# Altium PCB E-39 IPS.PcbDoc
Units mil, origin at the board's own origin, x right, y up, seen from the top; angles counter-clockwise.
Board outline 1428.58 x 2023.08 mil, 2 copper layers (Top Layer, Bottom Layer); 36 components, 68 nets, 305 pads, 129 vias.
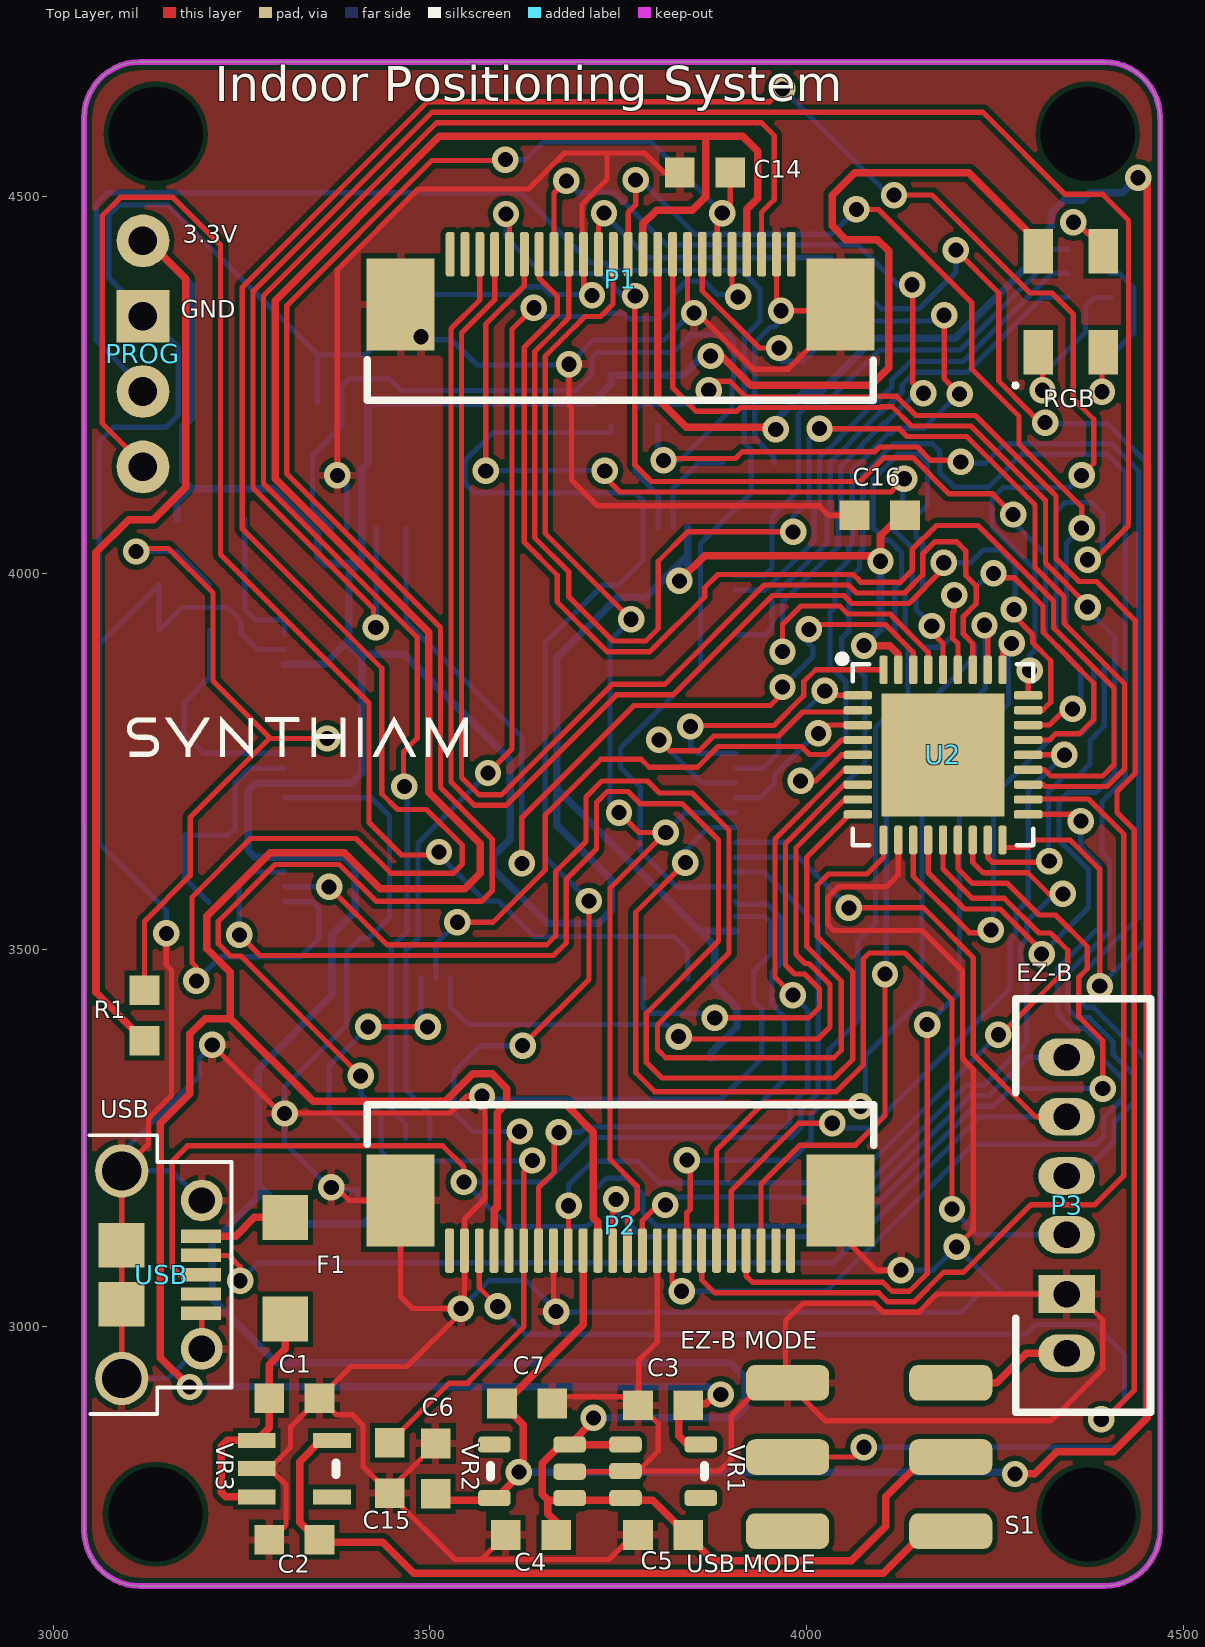
[diagram p0: Top Layer view]
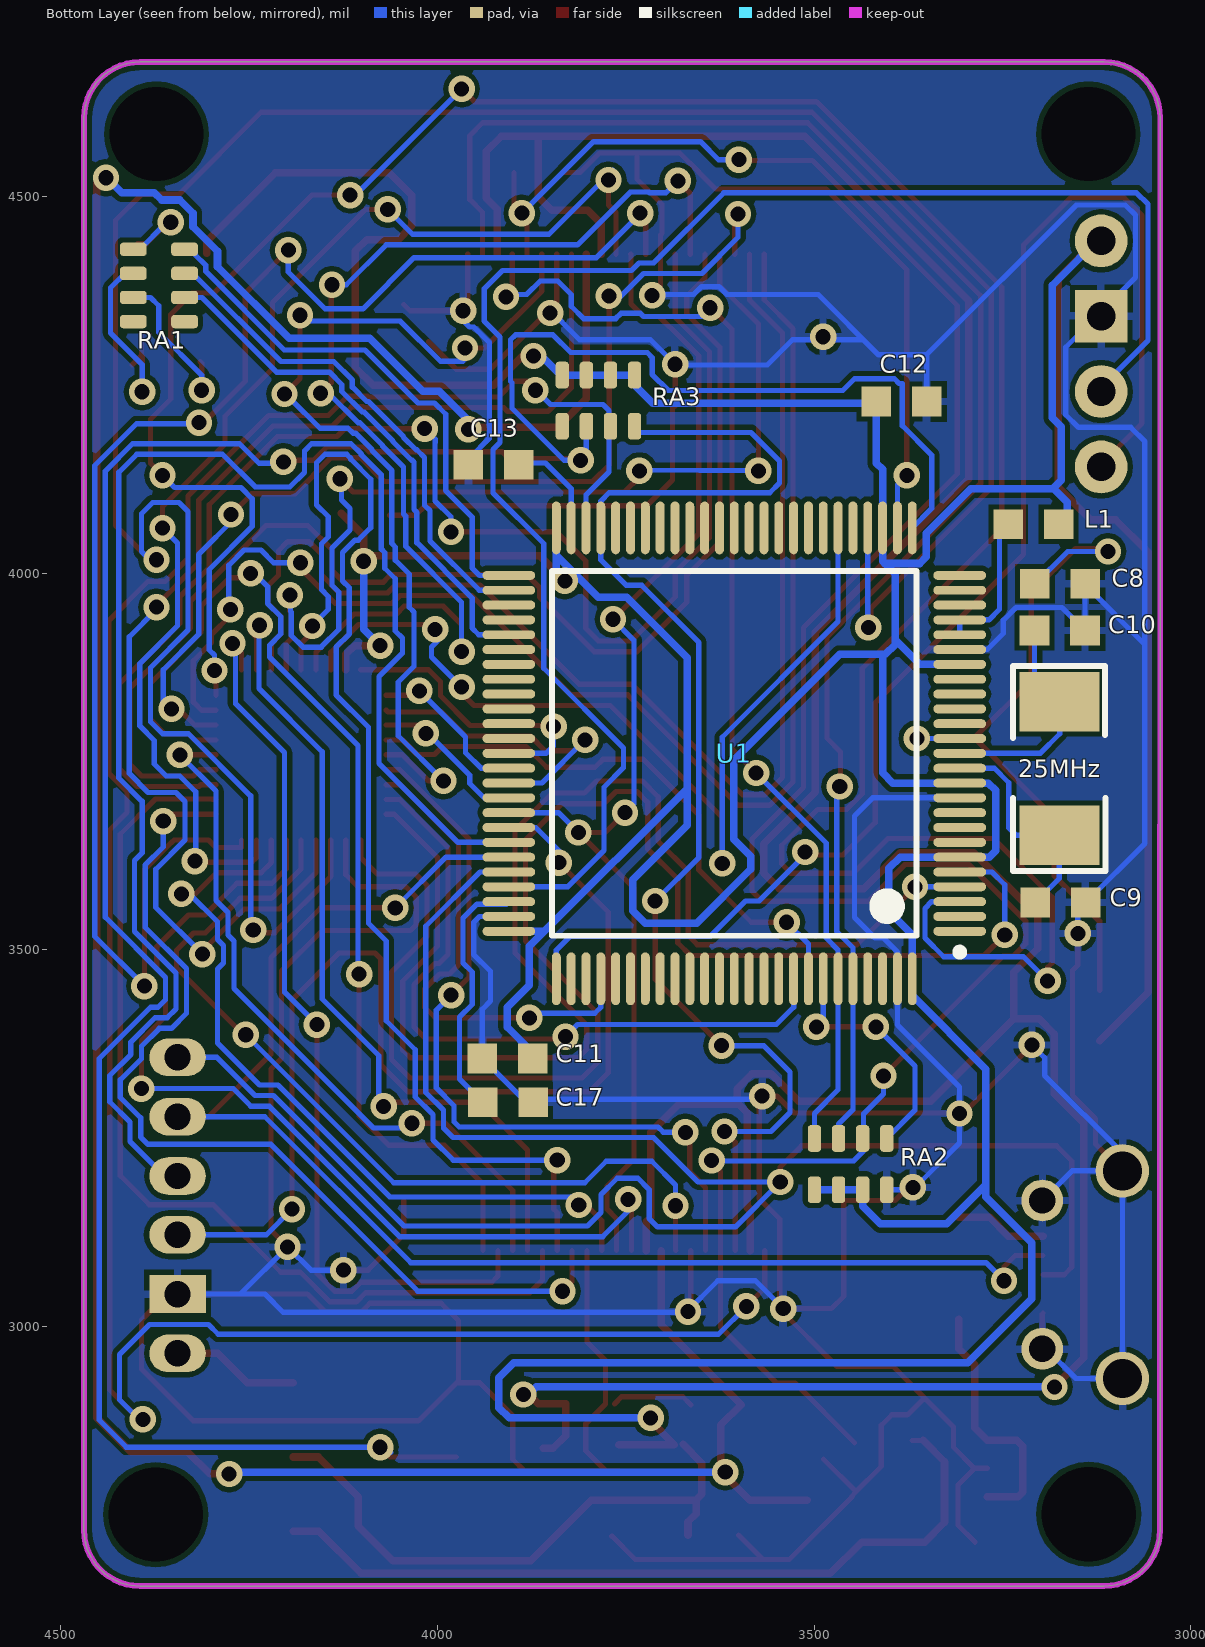
[diagram p1: Bottom Layer view, seen from below]

## Layer stack, top to bottom
Top Layer: signal copper 1.4
Dielectric: dielectric 12.6, FR-4, Dk 4.8
Bottom Layer: signal copper 1.4

## Board outline
3040.8,2730.03 3040.68,4604.46 3040.69,4604.46 cw(c3115,4604.46) 3115,4678.77 3115,4678.71 4394.88,4678.7 cw(c4394.88,4604.38) 4469.19,4604.38 4469.27,4604.38 4469.27,2730.01 cw(c4394.95,2730.01) 4394.95,2655.69 4394.95,2655.7 3115.18,2655.71 3115.18,2655.72 cw(c3115.18,2730.03)

## Design rules (kind name [scope] priority, off if disabled: settings)
Clearance [All] p1: gap=7
PolygonConnect [All] p1: connectstyle=Relief reliefconductorwidth=10 reliefentries=4 polygonreliefangle="90 Angle"
RoutingVias [All] p1: holewidth=20 width=35 viastyle="Through Hole" minholewidth=20 minwidth=35 maxholewidth=28 maxwidth=50
SMDNeckDown [All] p1: percent=93.000
SilkscreenOverComponentPads [All] p1: minsilkscreentomaskgap=10
SolderMaskExpansion [All] p1: expansion=4
Width Width_2 [InNet('VIN')] p1: maxlimit=50 minlimit=7 preferedwidth=50 minimp=50.000000 maximp=50.000000 favimp=50.000000
Width Width_1 [InNet('1.5V') OR  InNet('VCC') OR InNet('2.8V') OR InNet('3.3V') OR InNet('VDD')] p2: maxlimit=10 minlimit=7 preferedwidth=10 minimp=50.000000 maximp=50.000000 favimp=50.000000
Width [All] p3: maxlimit=15 minlimit=7 preferedwidth=7 minimp=50.000000 maximp=50.000000 favimp=50.000000
27 further rules are at their usual default settings.

## Components (designator, comment, footprint, x,y, rotation, side; value= is the part's Value field where it differs from the comment)
25MHz "XTAL 8MHz" Crystal 3175,3742 r90 bottom
C1 "Cap" "0603 TIGHT" 3320,2905 r0 top
C2 "Cap" "0603 TIGHT" 3320,2717 r180 top
C3 "2.2uF" "0603 TIGHT" 3809.5,2895.5 r180 top
C4 "2.2uF" "0603 TIGHT" 3634,2723.5 r180 top
C5 "2.2uF" "0603 TIGHT" 3809.5,2723.5 r180 top
C6 "2.2uF" "0603 TIGHT" 3507.5,2811.5 r90 top
C7 "100nF" "0603 TIGHT" 3629,2898 r0 top
C8 "100nF" "0603 TIGHT" 3173.5,3986 r180 bottom
C9 "18pF" "0603 TIGHT" 3173,3563 r180 bottom
C10 "18pF" "0603 TIGHT" 3174,3924 r180 bottom
C11 "100nF" "0603 TIGHT" 3907,3356 r0 bottom
C12 "100nF" "0603 TIGHT" 3384,4228 r0 bottom
C13 "2.2uF" "0603 TIGHT" 3925.5,4144 r0 bottom
C14 "18pF" "0603 TIGHT" 3865,4532 r0 top
C15 "18pF" "0603 TIGHT" 3446.5,2812.5 r90 top
C16 "18pF" "0603 TIGHT" 4097,4077 r0 top
C17 "2.2uF" "0603 TIGHT" 3906.5,3298 r180 bottom
F1 "PolyFuse - 500mA" 1206 3308,3010 r90 top
L1 "Ferrite" "0603 tight" 3209,4065.25 r180 bottom
P1 "FPC 24pin Header" "FPC Connector 24pin" 4078,4382.5 r180 top (schematic designator P2)
P2 "FPC 24pin Header" "FPC Connector 24pin" 3427.61,3142 r0 top
P3 "6-pin JST" "JST-PH 6pin" 4345,3161 r90 top
PROG "Not populated" HDR1X4 3119,4441.25 r270 top
R1 "Res1" "0603 TIGHT" 3121,3413 r270 top
RA1 "680 ohm" "Resistor Array 4" 4368.5,4381.5 r270 bottom
RA2 "4.7kohm" "Resistor Array 4" 3451,3217 r180 bottom
RA3 "4.7kohm" "Resistor Array 4" 3787,4228 r0 bottom
RGB "RGBLED-CA" RGBLED-CA 4350.5,4360.5 r270 top (schematic designator "RGB LED")
S1 "DPDT" "SWITCH DPDT SMD" 4083,2827 r0 top
U1 "STM32F407VET6" LQFP100_M 3606,3761 r0 bottom
U2 "TS3DV20812" QFN-36 4181,3759 r0 top
USB "USB Connector" "MICRO USB" 3144,3069 r270 top
VR1 "2.8VREG" "SOT-25 New" 3816.5,2808.5 r90 top
VR2 "1.5VREG" "SOT-25 New" 3628.5,2807.5 r270 top
VR3 "SPX3819M5-L-3-3/TR" SOT-25 3370,2774 r90 top

## Footprints (in the part's own frame and the unit in brackets; to place one, negate y for a bottom-side part, rotate by r counter-clockwise, add the part's x,y. Pads: shape width x height; smd on the part's side, far side on the other; paste and mask are expansions set on the pad)
"0603 TIGHT" [mm]
  rect 1x1 smd: 1(-0.85,0) 2(0.85,0)
"0603 tight" [mm]
  rect 1x1 smd: 1(-0.85,0) 2(0.85,0)
1206 [mil]
  rect 60x60 smd: 1(0,0) 2(135,0)
Crystal [mm] "16Mhz Crystal"
  rect 2x2.7 smd: 1(-2.276,-0.01) 2(2.22,-0.01)
  silkscreen extent -3.48,-1.57 3.43,1.54
"FPC Connector 24pin" [mm]
  rect 2.3x3.1 smd: 0(0.843,0.65) 0(15.677,0.65)
  rrect50% 0.3x1.5 smd: 1(2.5,-1.041) 2(3,-1.041) 3(3.5,-1.041) 4(4,-1.041) 5(4.5,-1.041) 6(5,-1.041) 7(5.5,-1.041) 8(6,-1.041) 9(6.5,-1.041) 10(7,-1.041) 11(7.5,-1.041) 12(8,-1.041) 13(8.5,-1.041) 14(9,-1.041) 15(9.5,-1.041) 16(10,-1.041) 17(10.5,-1.041) 18(11,-1.041) 19(11.5,-1.041) 20(12,-1.041) 21(12.5,-1.041) 22(13,-1.041) 23(13.5,-1.041) 24(14,-1.041)
  silkscreen extent -0.27,2.51 16.8,3.88
HDR1X4 [mil] "Connector; Header; 4 Position"
  round 70 hole 38: 1(0,0) 3(200,0) 4(300,0)
  rect 70x70 hole 38: 2(100,0)
"JST-PH 6pin" [mil]
  oval 50x75 hole 35: 1(-196.46,0) 3(-38.98,0) 4(38.98,0) 5(117.72,0) 6(196.46,0)
  rect 50x75 hole 35: 2(-117.72,0)
  silkscreen extent -274,-111 274,68
LQFP100_M [mm] "Thin QFP, 100-Leads, Body 14x14mm, Pitch 0.5mm, IPC Low Density"
  oval 1.778x0.3 smd: 1(-7.6,6) 2(-7.6,5.5) 3(-7.6,5) 4(-7.6,4.5) 5(-7.6,4) 6(-7.6,3.5) 7(-7.6,3) 8(-7.6,2.5) 9(-7.6,2) 10(-7.6,1.5) 11(-7.6,1) 12(-7.6,0.5) 13(-7.6,0) 14(-7.6,-0.5) 15(-7.6,-1) 16(-7.6,-1.5) 17(-7.6,-2) 18(-7.6,-2.5) 19(-7.6,-3) 20(-7.6,-3.5) 21(-7.6,-4) 22(-7.6,-4.5) 23(-7.6,-5) 24(-7.6,-5.5) 25(-7.6,-6) 51(7.6,-6) 52(7.6,-5.5) 53(7.6,-5) 54(7.6,-4.5) 55(7.6,-4) 56(7.6,-3.5) 57(7.6,-3) 58(7.6,-2.5) 59(7.6,-2) 60(7.6,-1.5) 61(7.6,-1) 62(7.6,-0.5) 63(7.6,0) 64(7.6,0.5) 65(7.6,1) 66(7.6,1.5) 67(7.6,2) 68(7.6,2.5) 69(7.6,3) 70(7.6,3.5) 71(7.6,4) 72(7.6,4.5) 73(7.6,5) 74(7.6,5.5) 75(7.6,6)
  oval 0.3x1.778 smd: 26(-6,-7.6) 27(-5.5,-7.6) 28(-5,-7.6) 29(-4.5,-7.6) 30(-4,-7.6) 31(-3.5,-7.6) 32(-3,-7.6) 33(-2.5,-7.6) 34(-2,-7.6) 35(-1.5,-7.6) 36(-1,-7.6) 37(-0.5,-7.6) 38(0,-7.6) 39(0.5,-7.6) 40(1,-7.6) 41(1.5,-7.6) 42(2,-7.6) 43(2.5,-7.6) 44(3,-7.6) 45(3.5,-7.6) 46(4,-7.6) 47(4.5,-7.6) 48(5,-7.6) 49(5.5,-7.6) 50(6,-7.6) 76(6,7.6) 77(5.5,7.6) 78(5,7.6) 79(4.5,7.6) 80(4,7.6) 81(3.5,7.6) 82(3,7.6) 83(2.5,7.6) 84(2,7.6) 85(1.5,7.6) 86(1,7.6) 87(0.5,7.6) 88(0,7.6) 89(-0.5,7.6) 90(-1,7.6) 91(-1.5,7.6) 92(-2,7.6) 93(-2.5,7.6) 94(-3,7.6) 95(-3.5,7.6) 96(-4,7.6) 97(-4.5,7.6) 98(-5,7.6) 99(-5.5,7.6) 100(-6,7.6)
  silkscreen extent -7.72,-6.15 6.15,6.82, body extent -7,-7 7,7, height 1.6
"MICRO USB" [mm]
  round 1.8 hole 1.321: 0(-3.5,-1.35) 0(3.5,-1.35)
  round 1.408 hole 0.889: 0(-2.5,1.35) 0(2.5,1.35)
  rect 1.5x1.55 smd: 0(-1,-1.35) 0(1,-1.35)
  rect 0.45x1.35 smd: 1(-1.3,1.325) 2(-0.65,1.325) 3(0,1.325) 4(0.65,1.325) 5(1.3,1.325)
  silkscreen extent -4.7,-2.44 4.7,2.35
QFN-36 [mil]
  rect 163.39x163.39 smd: 0(0,0)
  rrect50% 38x11.02 smd: 1(-113,79) 2(-113,59.25) 3(-113,39.5) 4(-113,19.75) 5(-113,0) 6(-113,-19.75) 7(-113,-39.5) 8(-113,-59.25) 9(-113,-79) 19(113,-79) 20(113,-59.25) 21(113,-39.5) 22(113,-19.75) 23(113,0) 24(113,19.75) 25(113,39.5) 26(113,59.25) 27(113,79)
  rrect50% 11.02x38 smd: 10(-79,-113) 11(-59.25,-113) 12(-39.5,-113) 13(-19.75,-113) 14(0,-113) 15(19.75,-113) 16(39.5,-113) 17(59.25,-113) 18(79,-113) 28(79,113) 29(59.25,113) 30(39.5,113) 31(19.75,113) 32(0,113) 33(-19.75,113) 34(-39.5,113) 35(-59.25,113) 36(-79,113)
  silkscreen extent -139,-120 120,132
"Resistor Array 4" [mm]
  rrect50% 0.45x0.9 smd: 1(-1.235,0.834) 2(-1.235,-0.894) 3(-0.422,0.834) 4(-0.422,-0.894) 5(0.391,0.834) 6(0.391,-0.894) 7(1.204,0.834) 8(1.204,-0.894)
RGBLED-CA [mm]
  rect 1.5x1 smd: 1(1.7,-1.1) 2(-1.7,-1.1) 3(-1.7,1.1) 4(1.7,1.1)
  silkscreen extent 2.81,-1.88 2.83,-1.85
SOT-25 [mil]
  rect 20x50 smd: 1(0,0) 2(75,0) 3(38,100) 4(0,100) 5(75,100)
  silkscreen extent 30,-5 45,-5
"SOT-25 New" [mm]
  rrect50% 0.55x1.1 smd: 1(-0.914,-1.092) 2(0.889,-1.092) 3(0,1.448) 4(-0.914,1.448) 5(0.889,1.448)
  silkscreen extent -0.2,-1.22 0.18,-1.22
"SWITCH DPDT SMD" [mm]
  rrect50% 2.8x1.2 smd: 1(2.75,-2.5) 2(2.75,0) 3(2.75,2.5) 4(-2.75,-2.5) 5(-2.75,0) 6(-2.75,2.5)

## Part data
25MHz: library part XTAL, "Crystal Oscillator"
C1 C2: "Capacitor"
C3 C4 C5 C6 C7 C8 C9 C10 C11 C12 C13 C14 C15 C16 C17: library part Cap, "Capacitor"
F1: library part PolyFuse, "PTC .50A 15VDC RESETTABLE 1812L"
L1: library part Inductor, "Inductor"
P1 P2: library part "Header 24", "Header, 24-Pin"
P3: library part "Header 6", "Header, 6-Pin"
PROG: library part "Header 4"
R1: "Resistor"
RA1 RA2 RA3: library part "Resistor Array 4"
S1: library part "SWITCH DPDT"
U1: library part STM32F2
VR1 VR2 VR3: library part "Vreg SOT25"

## Free pads (board coordinates)
  round 0 hole 125 unplated: 1(3135.55,2751.05) 1(3136,4583) 1(4373,4583) 1(4374,2750.5)

## Via types
v1: diameter 35, hole 20, Top Layer to Bottom Layer, tented both sides, 129 vias

## Nets (pads, with @x,y where several pads share a name; then routed paths per layer and width w, separated by ;. In a path a pad name is that pad's centre, name@x,y a point inside that pad or via, vN(x,y) a via of type N, cw(c..) or ccw(c..) an arc to the next point about the centre after c; other vN are vias at no path point)
1.5V: C6.1 C7.1 P1.10 P2.10 VR2.2 | length 4012.7
  Top Layer w10: C6.1@3509.5,2769.5 3585.5,2769.5 3624,2808 3624,2869.54 3597.04,2896.5 3703.2,3002.66 P2.10 ; P1.10 3802.41,4231.59 3840,4194 v1@3959,4194 ; v1(4276.5,2804.5) 4302.5,2804.5 4332,2834 4407,2834 4452,2879 4452,4518 v1@4440,4530
  Bottom Layer w10: v1(3618,2807) 4275.5,2807 v1@4276.5,2808 ; v1(3959,4191) 3959,4203 3997.5,4241.5 4019.5,4241.5 4090,4312 4197,4312 4291.97,4406.97 4291.97,4427.35 4324.5,4459.88 4324.5,4478.22 4341.78,4495.5 4366.22,4495.5 4375.72,4505 4419,4505 v1@4439.5,4525.5
  other v1: 4440,4525
2.8V: C3.1 P1.4 P1.11 P2.4 P2.11 VR1.2 | length 4903.3
  Top Layer w10: v1(3181,2920) 3142,2959 3142,3270 3181,3309 3181,3388.5 3201.5,3409 3235,3409 ; P2.4 3585.09,3154.09 ; 3602,3295 3602,3316 3582.5,3335.5 3556.78,3335.5 3520.28,3299 3345,3299 3235,3409 ; P2.11 3722.88,3139 3717,3144.88 3717,3258 3680,3295 3600,3295 3589,3284 3589,3159.91 ; P1.11 3782.72,4464 3800.74,4482.01 3848.01,4482.01 3866,4500 3866,4580 ; VR1.2@3859.5,2838.5 3846.65,2838.5 3830,2855.15 3830,2897.5 3866.5,2897.5 v1@3879,2910 ; P1.4 3920.52,4483.52 3935,4498 3935,4560 3915,4580 3866,4580 ; 3235,3409 3235,3470.48 3203.5,3501.98 3203.5,3544.5 3288,3629 3386,3629 3434,3581 3546,3581 3567,3602 3567,3641 3498.5,3709.5 3498.5,3921.58 3294.5,4125.58 3294.5,4361.98 3512.52,4580 3866,4580 ; 3585.09,3154.09 3585.09,3156 3589,3159.91 ; 3585.09,3154.09 3589,3158 3589,3159.91
  Bottom Layer w10: v1(3181,2920) 3869,2920 v1@3879,2910
  other v1: 3886,2910
3.3V: P3.1 S1.3 | length 169.9
  Top Layer w10: S1.3 4252.43,2925.43 4291.54,2964.54 P3.1
5V: C1.1 F1.1 VR3.4 VR3.5 | length 337.5
  Top Layer w10: VR3.4 3229,2774 3223,2780 3223,2841 3231,2849 VR3.5 3286.54,2865.54 3286.54,2905.5 3286.54,2949.54 3308,2971 F1.1
BLUE: RA1.1 U1.51 | length 727.4
  Bottom Layer w7: U1.51 3944,3997.22 3954,4007.22 3954,4074.72 3989.15,4109.87 3989.15,4168.03 3989,4168.18 3989,4211.08 4003.92,4226 4025.92,4226 4096.42,4296.5 4203.42,4296.5 4307.47,4400.55 4307.47,4408.73 4321.47,4422.73 4321.47,4427.55 4324.03,4430.11 RA1.1@4346.68,4430.11
BOOT0: RA2.7 U1.94 | length 331.9
  Top Layer w7: v1(3418,3398) v1(3497,3398)
  Bottom Layer w7: RA2.7 3366,3287.43 3366,3346 v1(3418,3398) ; U1.94 3487.89,3407.11 v1(3497,3398)
D0: U1.63 U2.36 | length 399.5
  Top Layer w7: v1(3845.71,3796.63) 3845.71,3788.29 3846,3788 3856,3798 3956.6,3798 3996,3837.4 3996,3856 4012,3872 U2.36
  Bottom Layer w7: v1(3845.71,3796.63) 3846,3796.34 3846,3771 3856,3761 U1.63
D0_A: P1.19 U2.31 | length 1334
  Top Layer w7: v1(3574,4136) 3574,4331 3625.24,4382.24 P1.19 ; v1@3732,4137 3732,4128 3752,4108 4112,4108 v1@4120.25,4116.25 ; v1@4127.5,4123.5 v1(4129.5,4125.5) ; v1(4196,3971) 4196,3950.4 4194,3948.4 4194,3913.6 4200.75,3906.85 U2.31
  Bottom Layer w7: v1(3574,4136) v1@3731.99,4137 ; v1(4129.5,4125.5) 4127.5,4123.5 4127.5,4097.5 4116,4086 4116,4057.4 4140,4033.4 4140,3984.1 4131,3975.1 4131,3925.4 4154.4,3902 4178.6,3902 4194,3917.4 4194,3948.4 4195,3949.4 4195,3970 v1(4196,3971)
  other v1: 3732,4136
D0_B: P2.19 U2.29 | length 1131.5
  Top Layer w7: P2.19 3880.36,3234.36 3944,3298 4065,3298 4071,3292 v1(4071.5,3292.5) ; v1(4236,3931) 4237,3932 4247.2,3921.8 4240.25,3914.85 U2.29
  Bottom Layer w7: v1(4071.5,3292.5) 4078,3299 4078,3360 4153,3435 4153,3763 4237,3847 4237,3932 v1(4236,3931)
D1: U1.64 U2.1 | length 220.1
  Top Layer w7: v1(4024,3844) 4030,3838 U2.1
  Bottom Layer w7: U1.64 3942.32,3741.32 3962.74,3761.74 3962.74,3782.74 v1(4024,3844)
D1_A: P1.21 U2.30 | length 1736.2
  Top Layer w7: P1.21 3585.87,4363 3542,4319.13 3542,3729 3565,3706 3595,3706 3741.63,3852.63 3811.63,3852.63 3943.5,3984.5 4055.6,3984.5 4066.1,3974 4129.9,3974 4154,3998.1 4154,4025.6 4170.4,4042 4199,4042 4211,4030 4211,3997.4 4225,3983.4 4225,3959.6 4208,3942.6 4208,3919.4 4220.5,3906.9 U2.30
D1_B: P2.21 U2.28 | length 1225.6
  Top Layer w7: P2.21 3919.73,3067.27 3928,3059 4101.4,3059 4113.4,3047 4136.6,3047 4160,3070.4 v1(4160,3401) ; U2.28 4260,3895 v1(4272,3907)
  Bottom Layer w7: v1(4160,3401) 4203,3444 4203,3762 4268,3827 4268,3903 v1(4272,3907) 4272,3909 v1@4266,3915
D2: U1.65 U2.2 | length 417.4
  Top Layer w7: v1(3803.94,3779) 3818.44,3764.5 3857.2,3764.5 3876.7,3784 3962.4,3784 3994.4,3816 4065.75,3816 U2.2
  Bottom Layer w7: v1(3803.94,3779) 3861.31,3721.63 U1.65
D2_A: P1.22 U2.26 | length 1875.3
  Top Layer w7: P1.22 3566.19,4363.11 3528,4324.92 3528,3723.2 3559.2,3692 3600.8,3692 3747.43,3838.63 3822.63,3838.63 3954.5,3970.5 4049.8,3970.5 4060.3,3960 4135.7,3960 4180.5,4004.8 v1@4180.5,4013.5 ; v1(4275,3952) 4275,3943.6 4300,3918.6 4300,3908 4324,3884 4324,3829 4313.25,3818.25 U2.26
  Bottom Layer w7: v1(4182,4014) 4217.4,4014 4234.4,4031 4256.6,4031 4277,4010.6 v1@4277,3952
D2_B: P2.22 U2.24 | length 1438.8
  Top Layer w7: P2.22 3939.42,3189.42 3991,3241 4065,3241 4104,3280 v1(4104,3468) ; v1@4257.8,3997.2 4257.8,3994 4276,3994 4313.7,3956.3 4313.7,3924.7 4314,3924.4 4314,3921.8 4348,3887.8 4348,3887 4381,3854 4381,3806 4362,3787 4330.4,3787 4322.15,3778.75 U2.24
  Bottom Layer w7: v1(4104,3468) 4105.5,3469.5 4105.5,3771.5 4223,3889 4223,3904.4 4208,3919.4 4208,3942.6 4225.4,3960 4225.4,3982.4 4239,3996 v1@4249,3996 ; v1@4246,4003 v1@4248.8,4003
  other v1: 4248,4000
D3: U1.66 U2.3 | length 213.8
  Top Layer w7: v1(4015.5,3787.5) 4026.5,3798.5 U2.3
  Bottom Layer w7: U1.66 3937.82,3701.94 3957.24,3721.36 3957.24,3732.24 4004.62,3779.62 4015.5,3779.62 v1(4015.5,3787.5)
D3_A: P1.20 U2.25 | length 1453
  Top Layer w7: v1(3601,4477) 3605.56,4472.44 P1.20 ; v1@3771,4366 3772,4365 3772,4144 3794,4122 4071,4122 4102.5,4153.5 4141.1,4153.5 4189.1,4105.5 4246.5,4105.5 v1(4274,4078) ; U2.25 4322.1,3798.5 4343.6,3820 v1(4353,3820)
  Bottom Layer w7: v1(3601,4477) 3601,4446 3649,4398 3726.6,4398 3767.6,4357 3772,4357 3771,4358 v1@3771,4366 ; v1@4269,4073 4317,4025 4317,3918.8 4364,3871.8 4364,3830 v1@4349,3815
  other v1: 3772.5,4368
D3_B: P2.20 U2.23 | length 953.8
  Top Layer w7: P2.20 3900.05,3180.69 3989.36,3270 v1(4034,3270) ; U2.23 v1(4342,3759)
  Bottom Layer w7: v1(4034,3270) 4040.26,3263.74 4084.74,3263.74 4270,3449 4270,3511.9 4278,3519.9 4278,3549.8 4294,3565.8 4294,3711 v1(4342,3759)
D4: U1.79 U2.7 | length 655.5
  Top Layer w7: v1(3878,3410) 4003,3410 4017,3424 4017,3448.36 3997.36,3468 3984,3468 3972,3480 3972,3641.55 4049.95,3719.5 U2.7
  Bottom Layer w7: U1.79 3783.17,3424 3791.17,3416 3872,3416 v1(3878,3410)
D4_A: P1.18 U2.22 | length 1711.4
  Top Layer w7: P1.18 3644.93,4392.07 3669,4368 3669,4343.9 3649.6,4324.5 3625,4299.9 3625,4041.4 3669,3997.4 3669,3962 3735,3896 3792.2,3896 3864.7,3968.5 3864.7,3981 3882.2,3998.5 4061.8,3998.5 4070,3990.3 4070,3989.9 4071.9,3988 4124.1,3988 4140,4003.9 4140,4031.4 4172.1,4063.5 4227.51,4063.5 4327.7,3963.3 4327.7,3930.49 4328,3930.2 4328,3927.6 4364.01,3891.6 4408,3847.6 4408,3746 4393,3731 4324,3731 4315.75,3739.25 U2.22
D4_B: P2.18 U2.20 | length 1280.8
  Top Layer w7: P2.18 3860.68,3062 3877.68,3045 4095.6,3045 4107.6,3033 4142.4,3033 4181.68,3072.28 4208,3072.28 4297.72,3162 4382.5,3162 4421,3200.5 4421,3653.6 4374.22,3700.38 4298.31,3700.38 4298.31,3699.75 U2.20
D5: U1.92 U2.8 | length 933.5
  Top Layer w7: v1(3830,3385) 3833,3382 4015,3382 4031,3398 4031,3454.16 4003.16,3482 3998,3482 3986,3494 3986,3635.75 4050,3699.75 U2.8
  Bottom Layer w7: U1.92 3527.26,3424 3550.26,3401 3814,3401 v1(3830,3385)
D5_A: P1.16 U2.21 | length 1945
  Top Layer w7: P1.16 3684.3,4339.4 3663.6,4318.7 3639,4294.1 3639,4047.2 3684.3,4001.9 3684.3,3968.7 3743,3910 3786.4,3910 3803,3926.6 3803,4016 3842,4055 v1(3982,4055) ; v1(4017,4192) 4122.8,4192 4133.3,4181.5 4212.51,4181.5 4303,4091.01 4303,4007.8 4341.7,3969.1 4341.7,3936.29 4342,3935.99 4342,3933.4 4369.8,3905.6 4422,3853.4 4422,3740.2 4398.8,3717 4316.5,3717 4314,3719.5 U2.21
  Bottom Layer w7: v1(3982,4055) 3982,4075 4003.15,4096.15 4003.15,4173.83 4003,4173.98 4003,4178 v1(4017,4192)
D5_B: P2.16 U2.19 | length 1286.7
  Top Layer w7: P2.16 3821.31,3059.69 v1(3834,3047) ; U2.19 4355,3680 v1(4364,3671)
  Bottom Layer w7: v1(3834,3047) 4026,3047 4221,3242 4384,3242 4394,3252 4394,3277.4 4421,3304.4 4421,3327.6 4393,3355.6 4393,3372.16 4369.16,3396 4353,3396 4333,3416 4333,3475.2 4388,3530.2 4388,3612.8 4364,3636.8 v1(4364,3671)
D6: U1.4 U2.9 | length 1773.3
  Top Layer w7: v1(3366.17,3583.83) 3443,3507 3655,3507 3667,3519 3667,3604.2 3707,3644.2 3707,3703.28 3728,3724.28 3788.72,3724.28 3804.72,3708.28 3847.72,3708.28 3897,3659 3897,3495.83 3802,3400.83 3802,3368 3813,3357 4036,3357 4046,3367 4046,3458.96 4000,3504.96 4000,3623 4057,3680 U2.9
  Bottom Layer w7: U1.4 v1(3366.17,3583.83)
D6_A: P1.14 U2.18 | length 2136.4
  Top Layer w7: P1.14 3723.67,4469.67 3731,4477 v1(3731,4478) ; v1(4198,4429) 4255,4372 4255,4255.3 4296,4214.3 4296,4214 4307,4203 4316.5,4212.5 v1(4316.5,4200) ; U2.18 4260,3636 4294,3636 4304,3646 4349.4,3646 4352.4,3643 4353,3643 4389,3607 v1(4389,3452)
  Bottom Layer w7: v1(3731,4478) 3731,4477 3789,4419 4031,4419 4099,4351 4149,4351 4198,4400 v1(4198,4429) ; v1(4316.5,4200) 4316.5,4212.5 4330.5,4198.5 4399.5,4198.5 4454.87,4143.13 4454.87,3517.87 v1(4389,3452)
D6_B: P2.14 U2.16 | length 1074.7
  Top Layer w7: P2.14 3781.94,3141 3813,3172.06 3817.56,3167.5 3812.5,3162.44 v1(3812.5,3161.5) ; U2.16 4220.5,3616.01 4234.01,3602.5 4293.5,3602.5 4322,3574 4322.5,3574.5 v1(4340,3574.5)
  Bottom Layer w7: v1(3812.5,3161.5) 3812.5,3162.44 3817.56,3167.5 3813,3172.06 4063.17,3172.06 4211.82,3320.72 4236.22,3320.72 4292,3376.5 4292,3474.9 4284,3482.9 4284,3506.1 4292,3514.1 4292,3537.5 4329,3574.5 v1(4340,3574.5)
D7: U1.5 U2.10 | length 1988.1
  Top Layer w7: v1(3247,3520) 3274.37,3492.63 3664,3492.63 3681,3509.63 3681,3594 3721,3634 3721,3696 3735.28,3710.28 3763,3710.28 3779,3694.28 3834.72,3694.28 3883,3646 3883,3511.83 3787.17,3416 3787.17,3350.83 3808,3330 4036.54,3330 4061.12,3354.58 4061.12,3470.88 4014,3518 4014,3586 4029,3601 4080,3601 4102,3623 U2.10
  Bottom Layer w7: v1(3247,3520) 3247,3586.52 3264,3603.52 U1.5
D7_A: P1.12 U2.17 | length 1638.4
  Top Layer w7: P1.12 3763.04,4479.04 3773,4489 v1(3773,4522) ; v1(4066,4483) 4095.4,4483 4219,4359.4 4219,4271.5 4282,4208.5 4282,4171.4 4365,4088.4 v1(4365,4060) ; U2.17 4240.25,3622.75 4246.5,3616.5 4320.5,3616.5 v1(4322,3618)
  Bottom Layer w7: v1@3767,4532 3767,4535 3852,4450 4033,4450 v1(4066,4483) ; v1(4322,3618) 4321,3619 4321,3710 4342,3731 4360,3731 4376,3747 4376,3778.2 4395,3797.2 4395,3880.4 4345,3930.4 4345,4040 v1(4365,4060)
D7_B: P2.12 U2.15 | length 1286.3
  Top Layer w7: P2.12 3742.57,3164.57 v1(3747,3169) ; U2.15 4200.75,3607.76 4220.01,3588.5 4266.5,3588.5 4308.5,3546.5 4330.5,3546.5 4372.5,3504.5 4372.5,3475.1 4361,3463.6 4361,3412 4393,3380 v1(4393,3316)
  Bottom Layer w7: v1(3747,3169) 3747,3153.15 3780.65,3119.5 4050.2,3119.5 4223.42,3292.72 4247.81,3292.72 4271.1,3316 v1(4393,3316)
GND: C1.2 C2.2 C3.2 C4.2 C5.2 C6.2 C7.2 C8.2 C9.2 C10.2 C11.2 C12.1 C13.2 C14.1 C15.1 C16.1 C17.2 P1.0 P1.2 P1.8 P1.15 P2.0 P2.2 P2.8 P2.15 P3.2 PROG.2 RA2.8 S1.6 U1.10 U1.20 U1.27 U1.74 U1.99 U2.11 USB.0 USB.5 VR1.3 VR2.3 VR3.3 | length 14035.6
  Top Layer w7: USB.0@3090.85,2931.21 3090.85,3029.63 3090.85,3108.37 3090.85,3206.79 3126.5,3242.44 3126.5,3276.42 3157,3306.92 3157,3473 3150,3480 v1(3150,3522) ; USB.5 3197.15,3016.83 USB.0@3197.15,2970.58 ; v1(3211,3374) 3301.5,3283.5 3526.7,3283.5 3549.2,3306 v1(3569,3306) ; VR3.3 VR3.3@3287,2812 ; C2.2@3286.54,2714 3309,2736.46 3309,2790 VR3.3@3287,2812 ; v1(3369,3185) 3375.5,3185 3392.91,3167.59 3460.79,3167.59 3460.79,3040.21 3477.01,3023.99 v1(3541.01,3023.99) ; v1(3377,4130) 3377,4402.76 3484.24,4510 3631,4510 3653,4532 3653,4532.6 3678.4,4558 3735,4558 ; C15.1@3444.52,2781.02 3487.48,2823.98 ; C15.1 3411,2814.54 3411,2869 3397,2883 3375.96,2883 C1.2@3353.46,2905.5 ; C15.1@3449.25,2774.75 3533,2691 3568.04,2691 ; v1@3573,3302 3573,3170 3545.72,3142.72 P2.2 3545.72,3023.18 3469.54,2947 3394.96,2947 C1.2@3353.46,2905.5 ; C4.2 3568.04,2691 ; v1@3663.83,3020 P2.8 ; C7.2@3663.96,2896.5 3674.46,2907 3755.54,2907 C3.2@3765.04,2897.5 ; v1(3684.5,4277.5) 3684.5,4222.5 3688,4219 3688,4124 3722.5,4089.5 4016.54,4089.5 4029.04,4077 C16.1 ; VR2.3 3758.5,2807.5 VR1.3 ; v1(3715,4369) 3715,4370 3703.98,4381.02 P1.15 3703.98,4449 3701.89,4451.09 3701.89,4489.89 3735,4523 3735,4558 ; C5.2@3768.54,2722 3737.54,2691 3568.04,2691 ; P2.15 3801.62,2979.62 3777,2955 3777,2897.5 3803,2871.5 3803,2835 3776.5,2808.5 VR1.3 ; C14.1 3811,4532 3785,4558 3735,4558 ; P1.8 3841.78,4359.72 v1@3862.5,4339 ; v1(3850.5,4345.5) 3855.1,4345.5 3929.6,4271 3975.5,4271 P1.0@4012,4307.5 ; P1.2 3959.89,4354.61 v1(3966,4348.5) 4036.4,4348.5 P1.0@4044.81,4356.91 ; S1.6@3972,2925.43 3972,3007.96 3995.04,3031 4089.8,3031 4101.8,3019 4148.2,3019 4172.48,3043.28 P3.2 4358.72,3043.28 4393,3009 4393,2944 4324,2875 4025.16,2875 S1.6 3943.43,2925.43 3900,2882 3900,2824 3884.5,2808.5 VR1.3 ; P2.0@4044.81,3167.61 4044.81,3122.19 4092,3075 v1(4125,3075) ; U2.11 4121.75,3600 4105.75,3584 4042,3584 4028,3570 4028,3534 4036,3526 4153,3526 4207,3472 4207,3355.92 4221,3341.92 4221,3128 v1(4199,3106) ; VR3.3@3287,2812 3315,2840 3315,2867.04 C1.2@3353.46,2905.5
  Bottom Layer w7: 3060.77,3905.23 3140.54,3985 C10.2 3171.04,3954.5 3232,3954.5 3249,3937.5 3249,3920 3270.2,3898.8 U1.20 ; v1(3150,3522) 3150,3552.54 C9.2 3061,3641.54 3061,4175 3079.75,4193.75 3149.25,4193.75 3166,4210.5 3166,4300 3073.5,4392.5 3073.5,4475.5 3087,4489 3152,4489 3350.54,4290.46 C12.1@3350.54,4226 ; USB.0@3197.15,2970.58 3191.98,2970.58 3152.61,2931.21 3090.85,2931.21 USB.0@3090.85,3206.79 ; USB.0@3197.15,3167.43 3157.78,3206.79 USB.0@3090.85,3206.79 ; v1(3211,3374) 3194,3357 3194,3333.46 3090.85,3230.31 USB.0@3090.85,3206.79 ; U1.10 3422.39,3701.94 3446.34,3678 3446.34,3543.34 3419,3516 3408,3516 3389.46,3497.46 U1.99 3389.46,3400.46 3307,3318 3307,3244 3369.18,3181.82 RA2.8 RA2.8@3403.61,3168 ; 3350.54,4290 3414.54,4290 3494.54,4370 3615.9,4370 3626.4,4380.5 3649.6,4380.5 3660.1,4370 3715,4370 v1(3715,4369) ; v1(3377,4130) 3389.46,4117.54 U1.27 ; 3434.54,4310 3528.74,4310 3562.24,4276.5 3683.65,4276.5 3717.15,4310 3811.35,4310 v1@3856.68,4355.32 ; v1(3541.01,3023.99) 3578.02,3061 3628,3061 3670.01,3018.99 4204.7,3018.99 4229,3043.28 4261.72,3043.28 ; v1(3569,3306) 3573,3302 3886.46,3302 C11.2 3940.46,3421.3 3929.5,3432.27 3929.5,3471.73 3952,3494.23 3952,3536.46 3944,3544.46 U1.74 ; C13.2@3956.46,4146.5 3956.46,4153.94 3931,4179.4 3931,4306.1 3951.9,4327 3957.5,4327 3966,4335.5 v1(3966,4348.5) ; v1(4125,3075) 4168,3075 v1(4199,3106) 4261.72,3043.28 ; P3.2 4261.72,3043.28
  other v1: 3667.5,3020 3307.01,3282.99 3488,4314
GREEN: RA1.3 U1.52 | length 682.3
  Bottom Layer w7: U1.52 3944.44,3977.54 4010,4043.1 4010,4083.2 4017.15,4090.35 4017.15,4153.64 4027.51,4164 4028.6,4164 4045,4180.4 4045,4181.49 4091.51,4228 4093.9,4228 4113,4247.1 4113,4256.4 4137.6,4281 4207.72,4281 4324.83,4398.11 RA1.3@4346.68,4398.11
HSYNC: U1.29 U2.12 | length 3461.7
  Top Layer w7: v1@3431.5,3926 3425,3932.5 3425,3953.36 3265,4113.36 3265,4374.2 3502.8,4612 4234,4612 4343,4503 4393,4503 4427.3,4468.7 4427.3,4063.3 4381,4017 4373,4017 v1@4373,4023 ; U2.12 4141.5,3597.5 4216,3523 4248,3523 v1(4244.5,3526.5)
  Bottom Layer w7: v1@3428.83,3928 U1.29 ; v1(4244.5,3526.5) 4248,3523 4248,3704.6 4330.4,3787 4365,3787 4381,3803 4381,3874.6 4331,3924.6 4331,4082 4343,4094 4378,4094 4393,4079 4393,4029 4379,4015 v1@4373,4021 ; v1(4373,4018) v1@4373,4023
  other v1: 3428,3928
HSYNC_A: P1.9 U2.13 | length 1721.2
  Top Layer w7: P1.9 3822.09,4246.41 3853.5,4215 3907,4215 3912,4220 4097.72,4220 4098.72,4221 4113.6,4221 4139.1,4195.5 4218.3,4195.5 4317,4096.8 4317,4013.6 4375.6,3955 v1@4376,3955 ; U2.13 4161.25,3603 4209.75,3554.5 4256.5,3554.5 v1@4309.5,3501.5 ; v1@4373,3942 v1(4373,3955)
  Bottom Layer w7: v1(4312,3494.5) 4374,3556.5 4374,3607 4335,3646 4335,3697 4347.15,3709.15 4384,3709.15 4409,3734.15 4409,3915.81 4373,3951.81 v1(4373,3955)
HSYNC_B: P2.9 U2.14 | length 1154.4
  Top Layer w7: P2.9 3684,3101.5 v1(3684,3160.5) ; U2.14 4181,3607.71 4220.21,3568.5 4262.3,3568.5 4308.3,3522.5 4323.6,3522.5 4346.5,3499.6 4346.5,3476.5 v1@4262.5,3392.5
  Bottom Layer w7: v1(3684,3160.5) 3684,3188 3715.5,3219.5 3776,3219.5 3804.5,3191 4058,3191 v1(4254.5,3387.5)
MCLK: P1.13 P2.13 U1.67 | length 1636.5
  Top Layer w7: P1.13 3743,4423.13 3743,4357.4 3726.6,4341 3705.7,4341 3677.6,4312.9 3653,4288.3 3653,4053 v1(3767,3939) ; v1(3751,3682.28) 3777.28,3656 v1(3813,3656) 3739,3582 3739,3222.25 3775,3186.25 3775,3155.95 3762.25,3143.2 P2.13
  Bottom Layer w7: v1(3751,3682.28) 3739,3694.28 3739,3911 v1(3767,3939) ; v1(3813,3656) 3839.26,3682.26 U1.67
Net25MHz_1: 25MHz.1 C9.1 U1.12 | length 306.7
  Bottom Layer w7: C9.1 3174.61,3594.86 25MHz.1 3232,3652.4 3241.68,3662.09 3241.68,3722 3261,3741.32 U1.12
Net25MHz_2: 25MHz.2 C10.1 U1.13 | length 294.8
  Bottom Layer w7: C10.1 3207.46,3862.26 25MHz.2 3174,3829.4 3174,3787 3200,3761 U1.13
NetC8_1: C8.1 R1.1 U1.14 | length 998.1
  Top Layer w7: v1@3114.1,4033.05 3152.95,4033.05 3211.89,3974.11 3211.89,3857.11 3288.31,3780.69 v1(3363.69,3780.69) ; R1.1 3121,3538 3181.67,3598.67 3181.67,3675.67 3286.69,3780.69
  Bottom Layer w7: v1(3110,4029) 3163.46,4029 C8.1@3207.46,3985 ; U1.14 v1(3363.69,3780.69)
NetC13_1: C13.1 U1.49 | length 133.4
  Bottom Layer w7: U1.49 3822.54,4112.5 3856.54,4146.5 C13.1@3889.54,4146.5
NetC17_1: C17.1 U1.73 | length 338.9
  Bottom Layer w7: U1.73 3908.49,3560.87 3947.39,3560.87 3966,3542.26 3966,3482.93 3953.77,3470.7 3953.77,3427.8 3970.65,3410.92 3970.65,3328.68 C17.1
NetF1_2: F1.2 USB.1 | length 122.1
  Top Layer w10: USB.1 3242.18,3120.18 3267,3145 F1.2
NetL1_1: L1.1 U1.21 U1.22 | length 198
  Bottom Layer w7: L1.1@3254,4072 3254,3952.3 3268.13,3938.17 U1.22 U1.21
NetRA1_2: RA1.2 RGB.3 | length 124.4
  Top Layer w7: v1(4354,4466) 4360,4466 4362,4464 4361,4463 4386.5,4437.5 RGB.3@4398,4437.5
  Bottom Layer w7: v1(4354,4466) 4360,4466 4362,4464 4361,4463 4362.11,4463 4395,4430.11 RA1.2
NetRA1_4: RA1.4 RGB.4 | length 288
  Top Layer w7: v1(4392,4241) RGB.4@4392,4288 ; RGB.4@4393,4319.38 4393,4289 RGB.4@4405,4277
  Bottom Layer w7: v1(4392,4241) 4392,4277 4434,4319 4434,4379 4414.89,4398.11 RA1.4
NetRA1_6: RA1.6 RGB.1 | length 213.1
  Top Layer w7: v1(4313,4243) 4313,4279 RGB.1@4315.19,4281.19
  Bottom Layer w7: v1(4313,4243) 4313,4263 4370,4320 4370,4355.11 4381,4366.11 RA1.6
PCLK: U1.31 U2.34 | length 1288.2
  Top Layer w7: v1(3622,3615) 3622,3676 3770.63,3824.63 3951.63,3824.63 3968,3841 v1(3968,3849) ; v1@3999.9,3912.3 4005.5,3917.9 4003,3920.4 v1(4003,3925.5) 4009.5,3932 4104.6,3932 4141.5,3895.1 U2.34
  Bottom Layer w7: U1.31 3468.2,3936.2 3622,3782.41 v1(3622,3615) ; v1(3968,3849) 4008,3889 4008,3902 3999.9,3910.1 3999.9,3912.3 4005.5,3917.9 4003,3920.4 v1(4003,3925.5)
PCLK_A: P1.17 U2.33 | length 1487.1
  Top Layer w7: P1.17 3664.61,4504.61 v1(3681,4521) ; v1(3968,3896) 3968,3932 3992.5,3956.5 4044.01,3956.5 4054.51,3946 4110.4,3946 4161.25,3895.15 U2.33 ; v1@4141,4383 4141,4253 v1(4155,4239)
  Bottom Layer w7: v1(3681,4521) 3697,4505 3718.4,4505 3719.4,4506 3744,4506 3814,4436 4068,4436 4121,4383 v1(4140,4383) ; v1(3968,3896) 3968,3961.5 4042,4035.5 4042,4075.6 4045.15,4078.75 4045.15,4140.95 4073,4168.8 4073,4169.9 4103.1,4200 4105.5,4200 4144.5,4239 v1(4155,4239)
PCLK_B: P2.17 U2.32 | length 1669.2
  Top Layer w7: P2.17 3840.99,3125 3841,3151.34 3845.56,3155.9 3845.56,3216.44 v1(3841,3221) ; v1(4166,3930) 4166,3921.8 4181,3906.8 U2.32
  Bottom Layer w7: v1(3841,3221) 3979,3221 4006,3248 4006,3281.6 4029.5,3305.1 4029.5,3367.5 4068,3406 4068,3512 4091.5,3535.5 4091.5,3795.65 4134.5,3838.65 4134.5,3902.1 4117,3919.6 4117,3980.9 4126,3989.9 4126,4027.6 4109.6,4044 4105.1,4044 4088.5,4060.6 4088.5,4124.91 4115,4151.41 4115,4152.5 4120.5,4158 4149.25,4158 4160.5,4146.75 4160.5,4090.9 4145,4075.4 4145,4048.2 4154,4039.2 4154,3978.3 4145,3969.3 4145,3952 4160,3937 4174,3937 4167,3930 v1(4166,3930)
RED: RA1.5 U1.55 | length 717
  Bottom Layer w7: U1.55 3945.17,3918.48 3954,3927.31 3954,3967.3 4027.34,4040.63 4027.34,4080.74 4031.15,4084.55 4031.15,4147.84 4033.3,4150 4034.4,4150 4059,4174.6 4059,4175.7 4097.3,4214 4099.7,4214 4127,4241.3 4127,4250.6 4143.4,4267 4213.52,4267 4312.63,4366.11 RA1.5@4346.68,4366.11
RESET: C14.2 C15.2 P1.6 P2.6 RA2.5 | length 3223.1
  Top Layer w7: v1(3408,3333) 3249,3492 3235.4,3492 3219,3508.4 3219,3538 3294.5,3613.5 3379.58,3613.5 3428.23,3564.85 3568.85,3564.85 3582.5,3578.5 3582.5,3647.42 3514,3715.92 3514,3928 3310,4132 3310,4355.56 3502.44,4548 3603,4548 v1@3610,4541 ; C15.2 3525.54,2925 3550,2925 3624.46,2999.46 P2.6 3624.46,3205.96 v1@3637.5,3219 ; P1.6 3881.15,4469 v1@3889.07,4476.93 ; v1(3888,4478) v1@3889.07,4476.93 ; C14.2 3898.46,4486.31 v1@3889.07,4476.93
  Bottom Layer w7: v1(3408,3333) 3408,3309 3434.52,3282.48 3434.52,3250.91 RA2.5 3435.61,3232 3447.61,3220 v1@3636,3220 ; v1(3600,4549) 3627,4549 3651,4573 3793,4573 v1(3888,4478)
  other v1: 3636,3220.5
SCL1: P1.5 RA2.1 U1.95 | length 1589
  Top Layer w7: v1(3577,3735) 3609,3767 3609,4324 3632,4347 v1@3638,4341 ; v1@3625,4341 3636.5,4352.5 v1(3638,4352.5) ; P1.5 3900.83,4370 3903.83,4367 v1(3909,4367)
  Bottom Layer w7: RA2.1 3499.61,3283 3468.2,3314.41 U1.95 3468.2,3500.2 3484,3516 3484,3642 v1(3577,3735) ; v1(3638,4352.5) 3636.5,4352.5 3648,4341 3726.6,4341 3730.6,4345 3756.5,4345 3763.5,4338 3806,4338 3822.5,4354.5 3822.5,4370.1 3840.4,4388 3863.6,4388 3881.6,4370 3906,4370 v1(3909,4367)
SCL2: P2.5 RA3.1 U1.47 | length 1764.3
  Top Layer w7: P2.5 3604.77,3244.77 v1(3619,3259) ; v1(3623,3373) 3711,3461 v1(3711,3565)
  Bottom Layer w7: v1(3619,3259) 3557.3,3259 3532.04,3284.26 3532.04,3338.04 3567,3373 v1(3623,3373) ; v1(3711,3565) 3653,3623 3653,3908.15 3728.85,3984 3749.28,3984 3783.17,4017.89 U1.47 3783.17,4096 3772.17,4107 3559,4107 3546,4120 3546,4149 3584,4187 3740.39,4187 RA3.1@3740.39,4195.18
SDA1: P1.3 RA2.3 U1.96 | length 2250
  Top Layer w7: v1(3466,3717) 3452.48,3717 3465,3704.48 3465,3763 3483,3781 3483,3915.16 3279,4119.16 3279,4368.4 3508.6,4598 3940,4598 3957,4581 3957,4496 3940.2,4479.2 P1.3
  Bottom Layer w7: v1(3466,3717) 3452.48,3717 3459.24,3723.76 3470,3713 3470,3524.52 3448.52,3503.04 U1.96 3448.52,3288.09 3467.61,3269 RA2.3
SDA2: P2.3 RA3.3 U1.48 | length 3201.8
  Top Layer w7: P2.3 3565.4,3051.6 v1(3590,3027) ; v1(3870,4243) 3869,4243 3881,4255 3898.08,4255 3919.08,4234 4091.92,4234 4092.92,4235 4119.4,4235 4144.9,4209.5 4224.1,4209.5 4331,4102.6 4331,4019.4 4361.4,3989 4384.6,3989 4436,3937.6 4436,3734.4 4412,3710.4 4412,3682.4 4435,3659.4 4435,2916 4391,2872 v1(4391,2877)
  Bottom Layer w7: v1(3590,3027) 3627,2990 4291,2990 4304,3003 4382,3003 4422,2963 4422,2903 4391,2872 v1(4391,2877) ; U1.48 3802.85,4104.15 3772.39,4134.61 3772.39,4216 3780.39,4224 3850,4224 3869,4243 v1(3870,4243)
SEL: U1.3 U2.27 | length 3707.6
  Top Layer w7: v1(3190,3459) 3190,3477 3184,3483 3184,3570 3262,3648 3402,3648 3448,3602 3531,3602 3543,3614 3543,3639 3495.48,3686.52 3456.88,3686.52 3436,3707.4 3436,3874 3251,4059 3251,4380 3497,4626 3951,4626 v1(3968,4643) ; v1(4116,4502) 4166.5,4502 4296.5,4372 4325.5,4372 4354,4343.5 4354,4231.5 4381,4204.5 4381,4146 v1(4365,4130) v1@4365,4128 ; U2.27 4294,3873 v1(4296,3871)
  Bottom Layer w7: v1(3190,3459) 3222,3491 3328,3491 3353,3516 3353,3555.15 3344,3564.15 U1.3 ; v1(3968,4643) 4109,4502 v1(4116,4502) ; v1(4296,3871) 4296,3891.4 4303,3898.4 4303,4005 4246,4062 4246,4099 4261,4114 4349,4114 v1(4365,4130)
SWDCLK: PROG.4 U1.76 | length 1915.4
  Top Layer w7: PROG.4@3112,4152 3065,4199 3065,4475 3089,4499 3159,4499 3222,4436 3222,4025 3419,3828 3419,3669 3462,3626 v1@3512,3626
  Bottom Layer w7: v1@3512,3626 3573,3565 3591,3565 3638,3518 3824,3518 3842.22,3499.78 U1.76
  other v1: 3512,3630
SWDIO: PROG.3 U1.72 | length 2188.4
  Bottom Layer w7: PROG.3@3114,4252 3057,4309 3057,4490 3072,4505 3620,4505 3713,4412 3732.4,4412 3742.4,4402 3913.6,4402 3938,4377.6 3938,4334.75 3917,4313.75 3917,4173.6 3926.28,4164.32 3926.28,4106.78 3859,4039.5 3859,3874 3753,3768 3753,3742 3779,3716 3779,3632 3827.17,3583.83 U1.72
SWITCH: RA3.5 S1.5 U1.26 | length 3590.8
  Top Layer w7: v1(3810,4150) 3812.5,4152.5 3905.5,4152.5 3914.5,4161.5 4090.7,4161.5 4096.7,4167.5 4146.9,4167.5 4164.4,4150 4187,4150 ; S1.5 4063,2827 v1(4076,2840)
  Top Layer w10: v1@4194.5,4142.5 4199,4142.5 v1(4204.5,4148)
  Bottom Layer w7: U1.26 3344,4085.99 3344,4157 3383,4196 3383,4252 3387.28,4252 ; 3387.28,4252.03 3393.43,4258.19 3446.31,4258.19 3462,4242.5 3693.5,4242.5 3715,4264 3715,4286.5 3721.5,4293 3823,4293 3846.5,4316.5 3896.5,4316.5 3903,4310 3903,4255 3901,4253 3901,4219 3832,4150 v1(3810,4150) ; v1@3802.39,4157.61 RA3.5 ; v1@4062,2833 4069,2840 v1(4076,2840) 4413,2840 4449,2876 4449,3355.76 4380.76,3424 4371,3424 4361,3434 4361,3463.6 4440.87,3543.46 4440.87,4135.93 4404.8,4172 4263,4172 4237,4146 4197,4146 4194.5,4143.5 4194.5,4142.5 4199,4142.5 v1(4204.5,4148)
  Bottom Layer w10: v1@3802.39,4157.61 v1(3810,4150)
USART1_RX: P3.4 U1.69 | length 2142.7
  Bottom Layer w7: U1.69 3972.89,3642.89 4077.5,3747.5 4077.5,3863.01 4046.5,3894.01 4046.5,3913.99 4056,3923.49 4056,3992.7 4070,4006.7 4070,4027.6 4074.5,4032.1 4074.5,4130.71 4101,4157.21 4101,4158.3 4114.7,4172 4167,4172 4176.5,4162.5 4176.5,4134 4196,4114.5 4241.7,4114.5 4285.2,4158 4399,4158 4423,4134 4423,3728.35 4392,3697.35 4392,3628.6 4402,3618.6 4402,3524.4 4347,3469.4 4347,3421.8 4358.8,3410 4374.96,3410 4407,3377.96 4407,3361.4 4435,3333.4 4435,3298.6 4408,3271.6 4408,3245.79 P3.4@4354.84,3192.64 ; P3.4 4345,3184.73 P3.4@4354.27,3184.73
USART1_TX: P3.3 U1.68 | length 1459.3
  Top Layer w7: v1(3839,3616) 3773.17,3550.17 3773.17,3337.16 3798.32,3312 4039.54,3312 4075.12,3347.58 4075.12,3488 4083.12,3496 4130.68,3496 4193,3433.68 v1(4193,3156)
  Bottom Layer w7: v1(3839,3616) 3839,3632 3869.57,3662.57 U1.68 ; v1(4193,3156) 4226.98,3122.02 P3.3
USB_M: P3.5 U1.70 USB.2 | length 1921.4
  Top Layer w7: USB.2 3233,3094.59 3248,3079.59 v1(3248,3061) ; v1(4056,3556) 4155,3556 4221,3490 4221,3361.72 4304,3278.72 P3.5
  Bottom Layer w7: v1(3248,3061) 3272,3085 4035.5,3085 4229.22,3278.72 P3.5 ; U1.70 3988.8,3623.2 v1(4056,3556)
USB_P: P3.6 U1.71 USB.3 | length 2511.7
  Top Layer w7: USB.3 3168,3069 3158,3079 3158,3220 3178,3240 3517,3240 3545,3212 v1(3545,3192)
  Bottom Layer w7: U1.71 3943.48,3603.52 4015.5,3531.5 4015.5,3310.9 3992,3287.4 3992,3263.5 3979.5,3251 3713,3251 3654,3192 v1(3545,3192) 3604.5,3132.5 3708,3132.5 3719,3143.5 3719,3182 3734,3197 3761.43,3197 3782.91,3175.53 3782.91,3151.5 3800.9,3133.5 4044.4,3133.5 4217.62,3306.72 4242.01,3306.72 4292.75,3357.46 P3.6
VCC: C4.1 C5.1 C11.1 C12.2 C16.2 L1.2 PROG.1 R1.2 RA2.2 RA2.4 RA2.6 RA3.2 RA3.4 RA3.6 RA3.8 RGB.2 S1.2 U1.6 U1.11 U1.19 U1.28 U1.50 U1.75 U1.100 U2.35 VR1.4 VR1.5 VR2.4 VR2.5 | length 9430.6
  Top Layer w10: PROG.1@3112.5,4454.5 3176,4391 3176,4114 3133,4071 3100,4071 3056.7,4027.7 3056.7,3443.84 R1.2 ; 3649,2777.5 3649,2819 VR2.4@3674,2844 ; 3650.5,2776 3656.5,2770 3656.5,2752 3667.46,2741.04 C4.1 ; 3657,2769.5 3796,2769.5 3876,2689.5 4059.5,2689.5 4105,2735 4105,2774 4158,2827 S1.2 ; v1(3717,2879) 3717,2875 VR2.4 VR1.5 ; v1(3831,3990) 3864.5,4023.5 4098,4023.5 4098,4050.04 C16.2@4127.71,4079.75 ; v1(3872.5,4288.5) 3886.5,4288.5 3925.5,4249.5 4085.5,4249.5 4109,4273 4109,4428 4094,4443 4052.08,4443 4034,4461.08 4034,4501.5 4064,4531.5 4215,4531.5 4306,4440.5 RGB.2@4306,4425 ; v1(4076.11,3904) 4110,3904 4121.75,3892.25 U2.35
  Bottom Layer w10: PROG.1@3114,4452 3184,4382 3184,4206.58 3172,4194.58 3172,4123.5 3183.5,4112 3292,4112 3351,4053 3351,4022 3360,4013 3406.29,4013 ; L1.2@3164,4072 3164,4094 3182.75,4112.75 ; U1.19 3360,3879.11 3392.5,3911.61 ; 3409.15,3888.81 3409.15,3735.15 3395.63,3721.63 U1.11 3268.63,3721.63 3259,3712 3259,3632 3267.8,3623.2 U1.6 3386.02,3623.2 3401,3608.22 3401,3551.22 3369.78,3520 U1.100 3369.78,3439.78 3272,3342 3272,3188.54 ; RA2.2 RA2.4 RA2.6 3435.61,3160 3412.09,3136.47 3324.06,3136.47 3272,3188.54 ; v1(3717,2879) 3905,2879 3918.5,2892.5 3918.5,2932 3898.5,2952 3296,2952 3211,3037 3211,3111.54 3272,3172.54 3272,3188.54 ; v1(3831,3990) 3842.22,4001.22 3842.22,4024.22 ; U1.50 3842.22,4024.22 ; v1@3864.2,4291 3836.39,4263.18 3740.39,4263.18 3740.39,4251.89 3714.5,4226 3417.46,4226 3417.46,4146.31 3409.15,4138 U1.28 3409.15,4015.86 3406.29,4013 ; C11.1 3873.54,3363.82 3907.5,3397.78 3907.5,3424 3878,3453.5 3878,3504.78 3858,3524.78 ; U1.75 3858,3524.78 ; v1(4076.11,3904) 4098,3925.89 v1@4098,4011.5 ; 3392.5,3911.61 3392.5,3999.21 3406.29,4013 ; 3392.5,3911.61 3392.5,3905.46 3405.46,3892.5 3466,3892.5 3606.5,3752 3606.5,3647 3584,3624.5 3584,3607.5 3656,3535.5 3724,3535.5 3740.5,3552 3740.5,3593.38 3668.5,3665.38 3668.5,3714.28 ; 3668.5,3714.28 3668.5,3888.02 3748.98,3968.5 3786.5,3968.5 3842.22,4024.22 ; 3668.5,3714.28 3858,3524.78
  other v1: 4098,4016
VDD: C2.1 S1.1 VR3.2 | length 1050.8
  Top Layer w7: VR3.2@3355,2849 VR3.2
  Top Layer w10: VR3.2@3355,2849 3327,2821 3327,2740.46 3353.46,2714 3437.08,2714 3478.58,2672.5 4101.5,2672.5 4157.57,2728.57 S1.1
VSYNC: U1.93 U2.4 | length 778.9
  Top Layer w7: v1(3536.43,3536.85) 3583.53,3536.85 3653,3606.32 3653,3679.28 3726.72,3753 3780.5,3753 3791,3742.5 3855,3742.5 3882.5,3770 3993.4,3770 4003.9,3759.5 4027.1,3759.5 4046.35,3778.75 U2.4
  Bottom Layer w7: U1.93 3507.57,3508 v1(3536.43,3536.85)
VSYNC_A: P1.7 U2.5 | length 1266.7
  Top Layer w7: P1.7 3861.46,4374.94 3937.4,4299 v1(3963.5,4299) ; v1(3992,3724.5) 4011.9,3724.5 4046.4,3759 U2.5 ; v1(4182.5,4342.5) 4182.5,4258.5 v1(4203,4238)
  Bottom Layer w7: v1(3963.5,4299) 3963.5,4284.5 3966.5,4281.5 3996,4281.5 4049.5,4335 v1@4174,4335 ; v1(3992,3724.5) 3992.1,3724.5 4052,3784.4 4052,3855.6 4031,3876.6 4031,3948.5 4037.5,3955 4037.5,3999 4056,4017.5 4056,4035 4060.5,4039.5 4060.5,4136.51 4087,4163.01 4087,4164.1 4108.9,4186 4112.2,4186 4118.7,4192.5 4156,4192.5 v1@4195.5,4232
VSYNC_B: P2.7 U2.6 | length 1029.6
  Top Layer w7: P2.7 3644.14,3184.64 3665,3205.5 v1@3665,3258 ; v1(3981.77,3440) 3958,3463.77 3958,3647.34 4049.91,3739.25 U2.6
  Bottom Layer w7: v1(3671,3258) 3700.2,3258 3707.2,3265 3971,3265 3978,3272 3978,3293.2 4001.5,3316.7 4001.5,3420.27 v1(3981.77,3440)
pads on no net: P1.1 P1.23 P1.24 P2.1 P2.23 P2.24 RA1.7 RA1.8 RA3.7 S1.4 U1.1 U1.2 U1.7 U1.8 U1.9 U1.15 U1.16 U1.17 U1.18 U1.23 U1.24 U1.25 U1.30 U1.32 U1.33 U1.34 U1.35 U1.36 U1.37 U1.38 U1.39 U1.40 U1.41 U1.42 U1.43 U1.44 U1.45 U1.46 U1.53 U1.54 U1.56 U1.57 U1.58 U1.59 U1.60 U1.61 U1.62 U1.77 U1.78 U1.80 U1.81 U1.82 U1.83 U1.84 U1.85 U1.86 U1.87 U1.88 U1.89 U1.90 U1.91 U1.97 U1.98 U2.0 USB.4 VR1.1 VR2.1 VR3.1

## Polygon pours and split planes (outlines as drawn)
GND on Bottom Layer "btm pour" (solid, pour order 5): 3040.8,2730.03 3040.68,4604.46 3040.69,4604.46 cw(c3115,4604.46) 3115,4678.77 3115,4678.71 4394.88,4678.7 cw(c4394.88,4604.38) 4469.19,4604.38 4469.27,4604.38 4469.27,2730.01 cw(c4394.95,2730.01) 4394.95,2655.69 4394.95,2655.7 3115.18,2655.71 3115.18,2655.72 cw(c3115.18,2730.03)
GND on Top Layer "top pour" (solid, pour order 4): 3040.8,2730.03 3040.68,4604.46 3040.69,4604.46 cw(c3115,4604.46) 3115,4678.77 3115,4678.71 4394.88,4678.7 cw(c4394.88,4604.38) 4469.19,4604.38 4469.27,4604.38 4469.27,2730.01 cw(c4394.95,2730.01) 4394.95,2655.69 4394.95,2655.7 3115.18,2655.71 3115.18,2655.72 cw(c3115.18,2730.03)

## Keep-outs
Keep-Out Layer:
  lines w7.8: 3040.8,2730.03 3040.68,4604.46 cw(c3115,4604.46) 3115,4678.77 ; 3040.86,2730.03 ccw(c3115.18,2730.03) 3115.18,2655.72 4394.95,2655.7 ccw(c4394.95,2730.01) 4469.27,2730.01 4469.27,4604.38 ; 3115,4678.71 4394.88,4678.7 cw(c4394.88,4604.38) 4469.19,4604.38

## Silkscreen, mask and mechanical layers (free items; w line width, h text height)
Top Overlay:
  drawing of 2260 lines, arcs and shapes, not listed
  text "Indoor Positioning System" at 3214,4611 h80
  text "3.3V" at 3172,4431 h40
  text "GND" at 3169.5,4331.5 h40
  text "EZ-B" at 4278,3450.5 h40
  text "USB" at 3062.5,3269.5 h40
  text "EZ-B MODE" at 3832.12,2962.5 h40
  text "USB MODE" at 3840,2666 h40
Bottom Solder:
  text ":)" at 3727,2772 h150 r270